# Altium PCB LoRaGN.PcbDoc
Units mm, origin at the board's own origin, x right, y up, seen from the top; angles counter-clockwise.
Board outline 50 x 35 mm, 2 copper layers (Top Layer, Bottom Layer), stack 1.071 mm thick; 34 components, 30 nets, 190 pads, 175 vias.
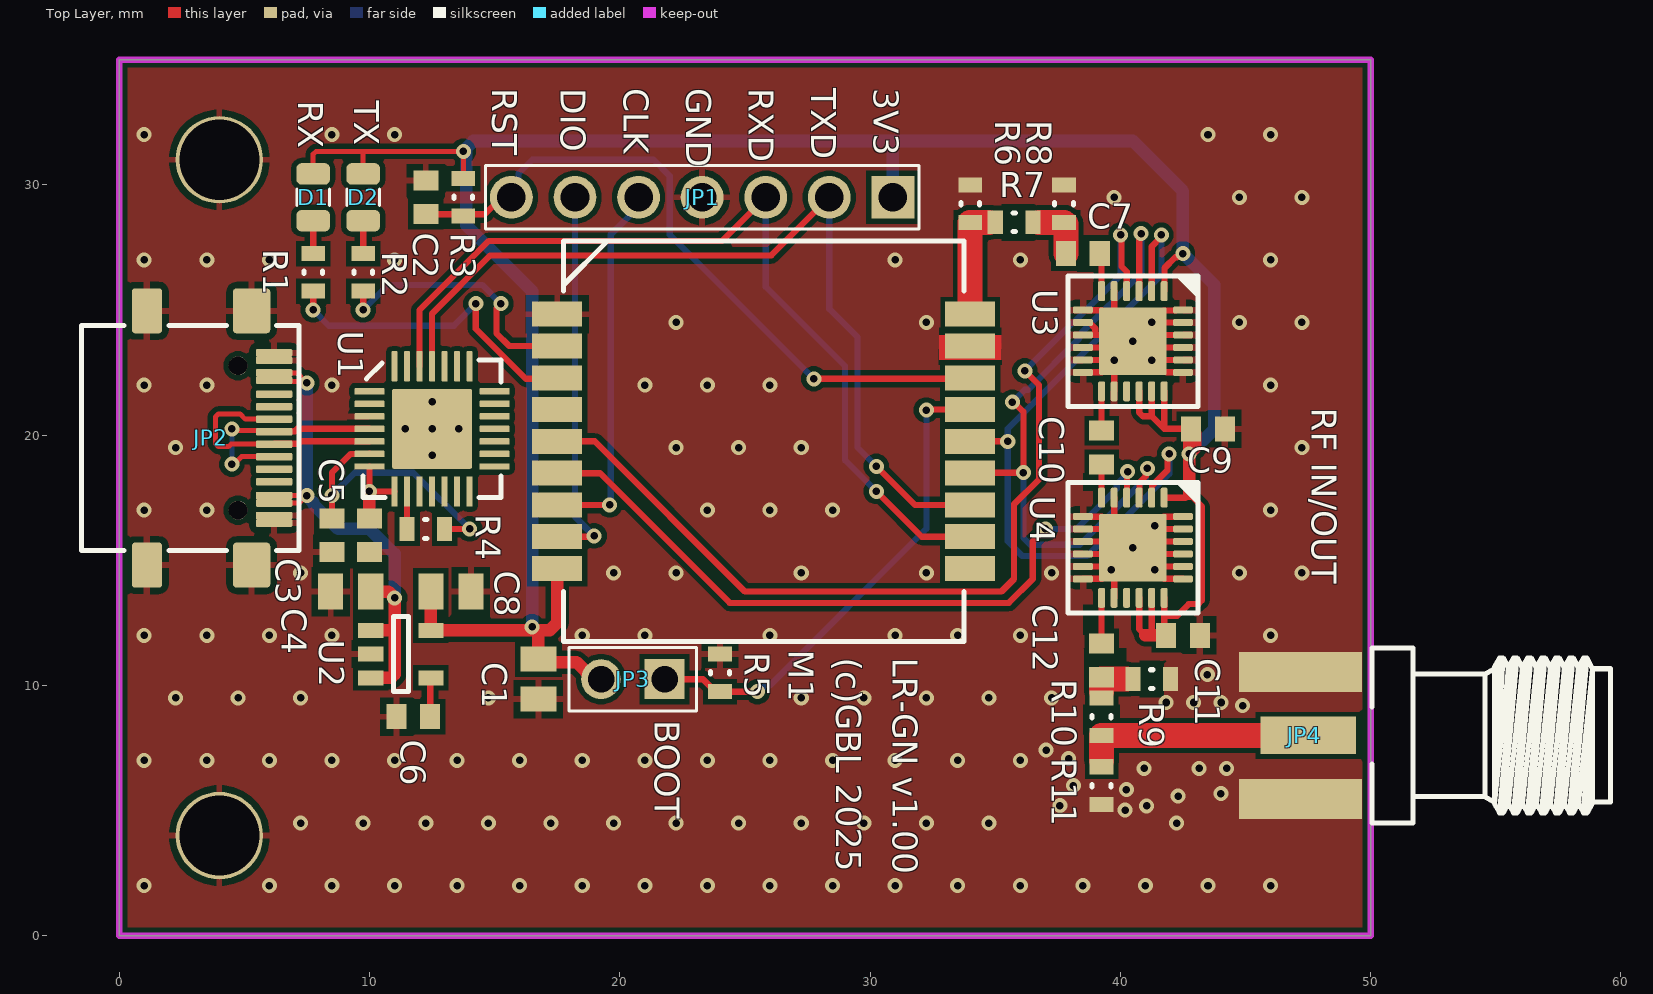
[diagram p0: Top Layer view]
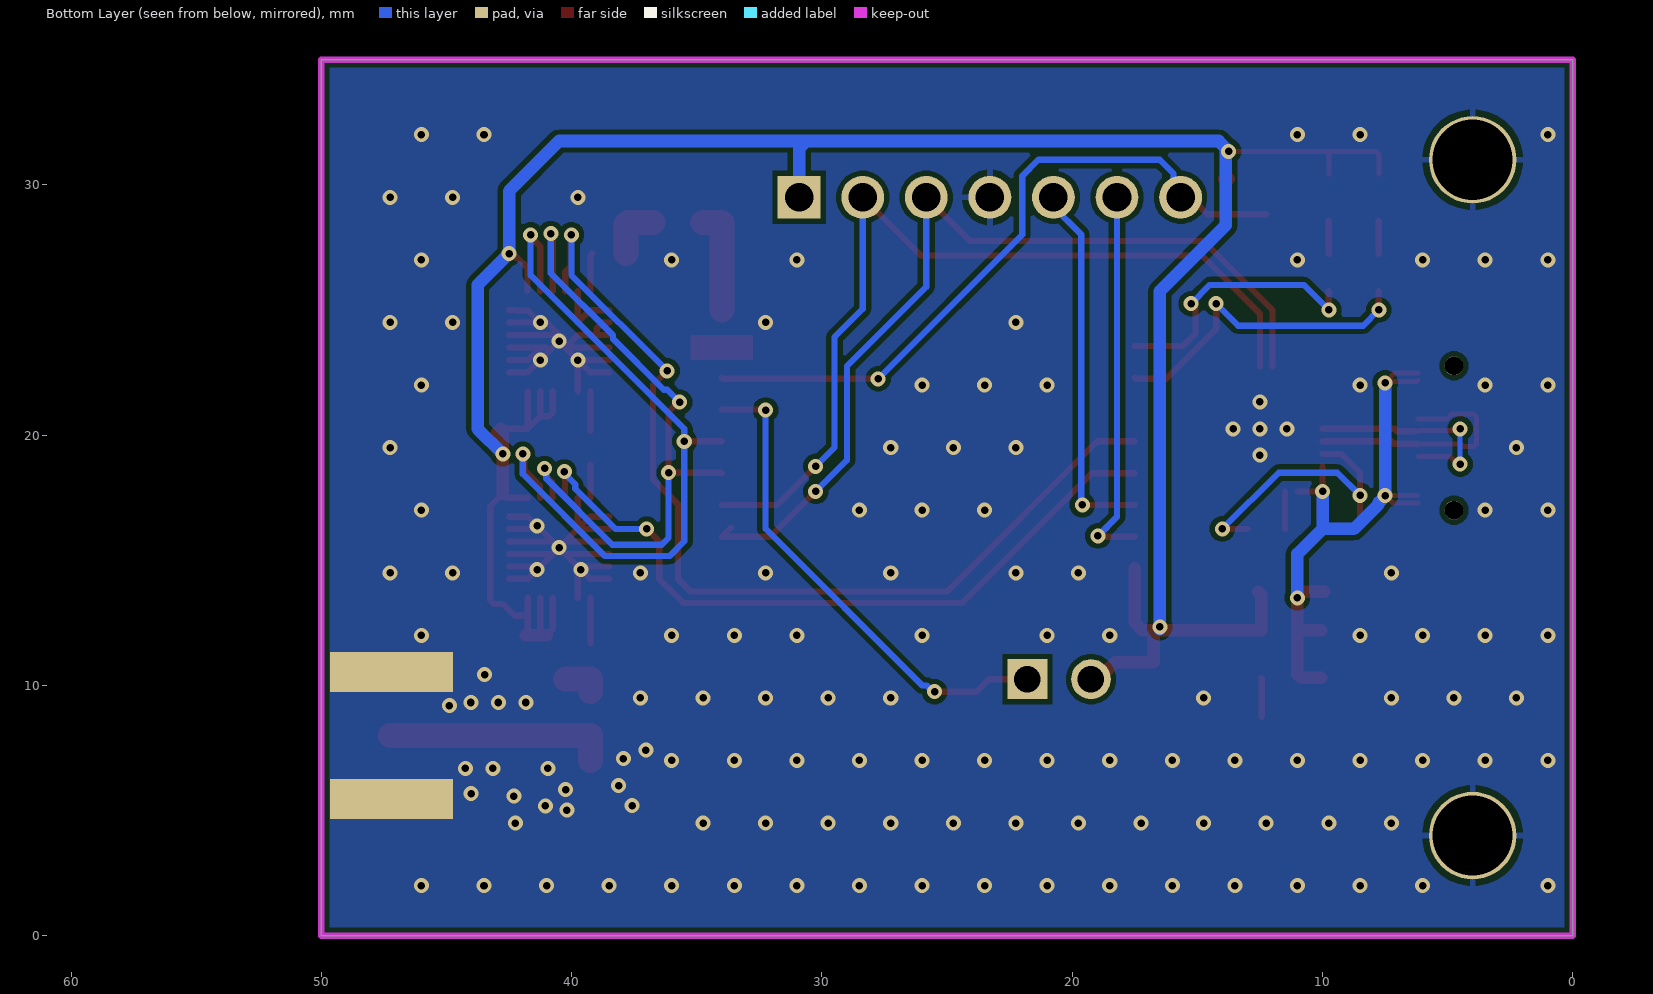
[diagram p1: Bottom Layer view, seen from below]
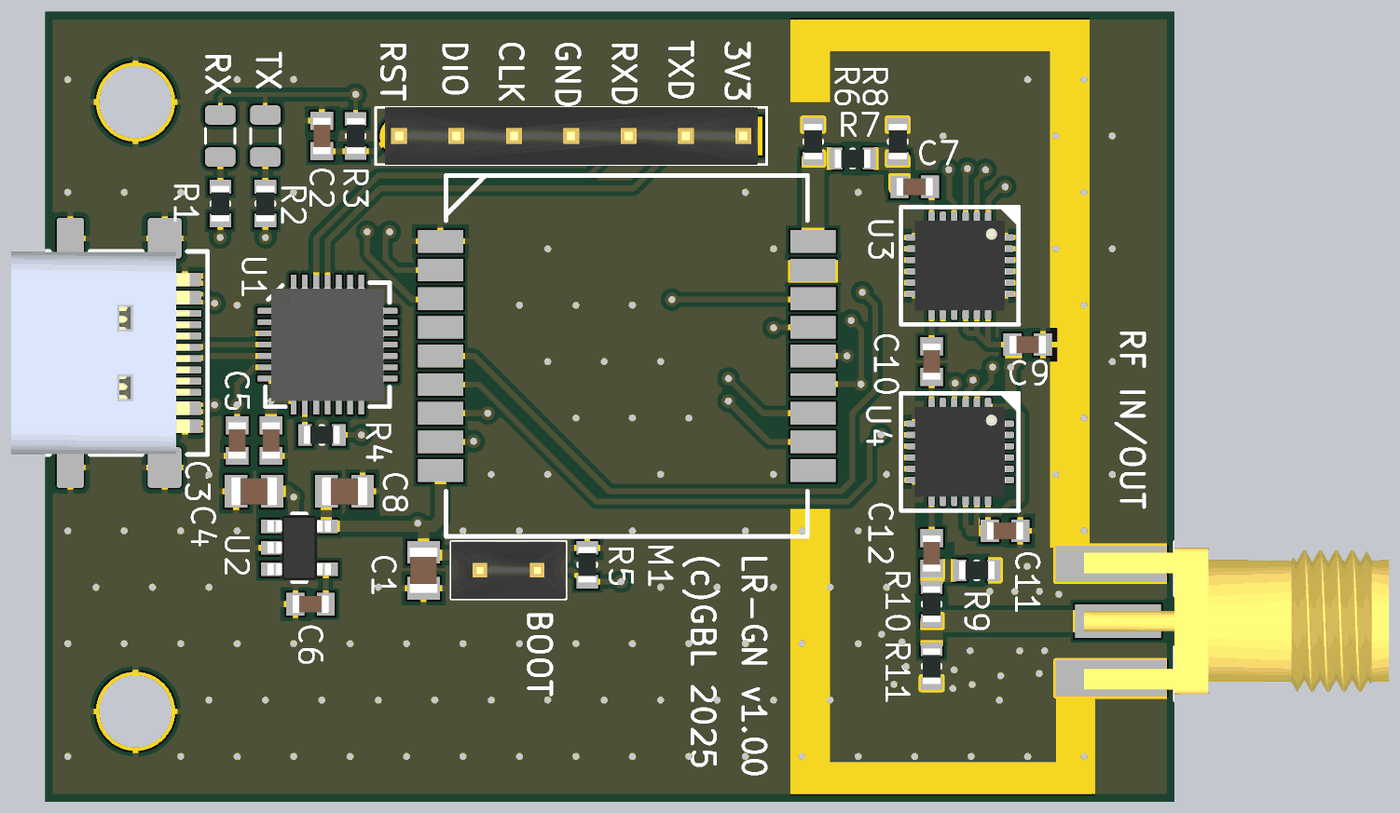
[diagram p2: 3D render of the assembled board from above, using the file's embedded part models]

## Layer stack, top to bottom
Top Solder: solder mask 0.0102, Solder Resist, Dk 3.5
Top Layer: signal copper 0.0356
Dielectric 1: dielectric 1, FR-4, Dk 4.6
Bottom Layer: signal copper 0.0356
Bottom Solder: solder mask 0.0102, Solder Resist, Dk 3.5

## Board outline
0,0 0,35 50,35 50,0

## Design rules (kind name [scope] priority, off if disabled: settings)
Clearance [All] p1: gap=0.2 ignorepadtopadclearanceinfootprint=FALSE
HoleSize [All] p1: absolutevalues=TRUE maxlimit=5 minlimit=0.025 maxpercent=80.000 minpercent=20.000
MinimumSolderMaskSliver [All] p1: minsoldermaskwidth=0.02
PolygonConnect PolygonConnect_2 [InComponent('JP4') Or InComponent('R6') Or InComponent('R8') Or InComponent('R9') Or InComponent('R11') vs IsNamedPolygon('GND_L01_P001') Or IsNamedPolygon('GND_L02_P000')] p1: thpad.connectstyle=Relief thpad.reliefconductorwidth=0.254 thpad.reliefentries=4 thpad.polygonreliefangle="90 Angle" thpad.airgapwidth=0.254 smdpad.connectstyle=Direct smdpad.reliefconductorwidth=0.254 smdpad.reliefentries=4 smdpad.polygonreliefangle="90 Angle" smdpad.airgapwidth=0.254 via.connectstyle=Relief via.reliefconductorwidth=0.254 via.reliefentries=4 via.polygonreliefangle="90 Angle" via.airgapwidth=0.254
PolygonConnect PolygonConnect_1 [All vs IsNamedPolygon('GND_L01_P001') Or IsNamedPolygon('GND_L02_P000')] p2: thpad.connectstyle=Relief thpad.reliefconductorwidth=0.254 thpad.reliefentries=4 thpad.polygonreliefangle="90 Angle" thpad.airgapwidth=0.254 smdpad.connectstyle=Relief smdpad.reliefconductorwidth=0.254 smdpad.reliefentries=4 smdpad.polygonreliefangle="90 Angle" smdpad.airgapwidth=0.254 via.connectstyle=Direct via.reliefconductorwidth=0.254 via.reliefentries=4 via.polygonreliefangle="90 Angle" via.airgapwidth=0.254
PolygonConnect [All] p3: connectstyle=Relief reliefconductorwidth=0.254 reliefentries=4 polygonreliefangle="90 Angle" airgapwidth=0.254
RoutingVias [All] p1: holewidth=0.711 width=1.27 viastyle="Through Hole" minholewidth=0.711 minwidth=1.27 maxholewidth=0.711 maxwidth=1.27
SilkToSilkClearance [All] p1: silktosilkclearance=0.1
SilkToSolderMaskClearance [IsPad] p1: minsilkscreentomaskgap=0.1 clearancetoexposedcopper=TRUE
SolderMaskExpansion [All] p1: expansion=0.102 istentingtop=FALSE
Width [All] p1: maxlimit=2 minlimit=0.2 preferedwidth=0.2
26 further rules are at their usual default settings.

## Components (designator, comment, footprint, x,y, rotation, side; value= is the part's Value field where it differs from the comment)
C1 "22uF" C-0805 16.75,10.25 r90 top
C2 "100nF" C-0603 12.25,29.5 r270 top
C3 "1000pF" C-0603 8.5,16 r270 top
C4 "22uF" C-0805 9.25,13.75 r180 top
C5 "1000pF" C-0603 10,16 r90 top
C6 "nc" C-0603 11.75,8.75 r180 top
C7 "100pF" C-0603 38.5,27.25 r0 top
C8 "22uF" C-0805 13.25,13.75 r0 top
C9 "10nF" C-0603 43.5,20.25 r180 top
C10 "100pF" C-0603 39.25,19.5 r270 top
C11 "10nF" C-0603 42.5,12 r180 top
C12 "100pF" C-0603 39.25,11 r270 top
D1 "DLED" LED0805 7.75,29.5 r270 top
D2 "DLED" LED0805 9.75,29.5 r270 top
JP1 "HEADER 7" PLS1-7 30.91,29.5 r180 top
JP2 "L-KLS1-5473" L-KLS1-5473 6.19,19.885 r270 top
JP3 "HEADER 2" PLS1-2 21.79,10.25 r180 top
JP4 "EM-SA071-GGT" SMA_F_EDGE 48.77,8 r180 top
M1 "RA-08" LGA18_RA08 25.75,19.75 r0 top
R1 "1k" R-0603 7.75,26.5 r90 top
R2 "1k" R-0603 9.75,26.5 r90 top
R3 "10k" R-0603 13.75,29.5 r90 top
R4 "10k" R-0603 12.25,16.25 r0 top
R5 "100k" R-0603 24,10.5 r270 top
R6 "RES" R-0603 34,29.25 r270 top
R7 "RES" R-0603 35.75,28.5 r0 top
R8 "RES" R-0603 37.75,29.25 r270 top
R9 "RES" R-0603 41.25,10.25 r180 top
R10 "RES" R-0603 39.25,8.75 r270 top
R11 "RES" R-0603 39.25,6 r90 top
U1 "CP2102" QFN28 12.5,20.25 r0 top value={Value}
U2 "LP5907MFX-3.0" SOT-23-5 11.25,11.25 r0 top
U3 "HMC1122LP4ME" QFN-24(4X4) 40.5,23.75 r270 top value=HMC8073LP3DE
U4 "HMC1122LP4ME" QFN-24(4X4) 40.5,15.5 r270 top value=HMC8073LP3DE

## Footprints (in the part's own frame and the unit in brackets; to place one, negate y for a bottom-side part, rotate by r counter-clockwise, add the part's x,y. Pads: shape width x height; smd on the part's side, far side on the other; paste and mask are expansions set on the pad)
C-0603 [mm] "Chip Capacitor, 2-Leads, Body 1,60x0,80mm, IPC Medium Density"
  rect 0.8x1 smd: 1(-0.675,0) 2(0.675,0)
  body extent -0.8,-0.4 0.8,0.4, height 0.8
C-0805 [mm] "Chip Capacitor, 2-Leads, Body 2,00x1,25mm, IPC Medium Density"
  rect 1x1.45 smd: 1(-0.8,0) 2(0.8,0)
  body extent -1,-0.62 1,0.63, height 1.25
L-KLS1-5473 [mm] "USB 3.1 Type C"
  rrect20% 1.8x1.5 smd mask+0.07: 1(-5.08,-0.9) 1(5.08,-0.9)
  rrect20% 1.8x1.2 smd mask+0.07: 1(-5.08,-5.08) 1(5.08,-5.08)
  rrect30% 0.3x1.45 smd paste-2 mask+0.07: A1(-3.1,0) A4(-2.6,0) A9(2.6,0) A12(3.4,0) B1(3.1,0) B4(2.3,0) B9(-2.3,0) B12(-3.4,0)
  rrect30% 0.3x1.45 smd mask+0.07: A5(-1.25,0) A6(-0.25,0) A7(0.25,0) A8(1.25,0) B5(1.75,0) B6(0.75,0) B7(-0.75,0) B8(-1.75,0)
  round 0.75 hole 0.75 unplated paste-2 mask+0.07: MH(-2.885,-1.44) MH(2.885,-1.44)
  silkscreen extent -4.5,-7.69 4.5,1, body extent -4.47,-7.7 4.47,0.2, height 3.2
LED0805 [mm] "LED, Chip; 2.00 mm L X 1.25 mm W X 0.80 mm H body"
  rrect51% 0.86x1.35 smd: 1(-0.935,0) 2(0.935,0)
  silkscreen extent -0.33,-0.65 0.33,0.65, body extent -1,-0.63 1,0.63, height 0.25
LGA18_RA08 [mm]
  rect 2x1 smd: 1(-8.25,5.08) 2(-8.25,3.81) 3(-8.25,2.54) 4(-8.25,1.27) 5(-8.25,0) 6(-8.25,-1.27) 7(-8.25,-2.54) 8(-8.25,-3.81) 9(-8.25,-5.08) 10(8.25,-5.08) 11(8.25,-3.81) 12(8.25,-2.54) 13(8.25,-1.27) 14(8.25,0) 15(8.25,1.27) 16(8.25,2.54) 17(8.25,3.81) 18(8.25,5.08)
  silkscreen extent -8,-8 8,8, body extent -7.5,-7.5 7.5,7.53, height 1.5
PLS1-2 [mm] "Header, Vertical, 2.54 mm pitch; 0.64 mm lead width, 2 pins, 1 row, 2 pins per row, 5.08 mm L X 2.54 mm W X 8.54 mm H body"
  rect 1.59x1.59 hole 1.06 paste-1.59: 1(0,0)
  round 1.59 hole 1.06 paste-1.59: 2(2.54,0)
  silkscreen extent -1.27,-1.27 3.81,1.27, body extent -1.27,-1.27 3.81,1.27, height 8.54
PLS1-7 [mm] "Header, Vertical, 2.54 mm pitch; 0.70 mm lead width, 7 pins, 1 row, 7 pins per row, 16.51 mm L X 2.54 mm W X 7.54 mm H body"
  rect 1.71x1.71 hole 1.14 paste-1.71: 1(0,0)
  round 1.71 hole 1.14 paste-1.71: 2(2.54,0) 3(5.08,0) 4(7.62,0) 5(10.16,0) 6(12.7,0) 7(15.24,0)
  silkscreen extent -1.04,-1.27 16.28,1.27, body extent -0.64,-1.27 15.88,1.27, height 7.54
QFN28 [mm]
  rrect20% 1.2x0.25 smd: 1(-2.5,1.5) 2(-2.5,1) 3(-2.5,0.5) 4(-2.5,0) 5(-2.5,-0.5) 6(-2.5,-1) 7(-2.5,-1.5) 15(2.5,-1.5) 16(2.5,-1) 17(2.5,-0.5) 18(2.5,0) 19(2.5,0.5) 20(2.5,1) 21(2.5,1.5)
  rrect20% 0.25x1.2 smd: 8(-1.5,-2.5) 9(-1,-2.5) 10(-0.5,-2.5) 11(0,-2.5) 12(0.5,-2.5) 13(1,-2.5) 14(1.5,-2.5) 22(1.5,2.5) 23(1,2.5) 24(0.5,2.5) 25(0,2.5) 26(-0.5,2.5) 27(-1,2.5) 28(-1.5,2.5)
  rrect5% 3.2x3.2 smd paste-4: 29(0,0)
  silkscreen extent -2.75,-2.75 2.75,2.75, body extent -2.5,-2.5 2.5,2.5, height 1
QFN-24(4X4) [mm]
  rrect50% 0.8x0.28 smd mask+0.06: 1(-2,1.25) 2(-2,0.75) 3(-2,0.25) 4(-2,-0.25) 5(-2,-0.75) 6(-2,-1.25) 13(2,-1.25) 14(2,-0.75) 15(2,-0.25) 16(2,0.25) 17(2,0.75) 18(2,1.25)
  rrect50% 0.28x0.8 smd mask+0.06: 7(-1.25,-2) 8(-0.75,-2) 9(-0.25,-2) 10(0.25,-2) 11(0.75,-2) 12(1.25,-2) 19(1.25,2) 20(0.75,2) 21(0.25,2) 22(-0.25,2) 23(-0.75,2) 24(-1.25,2)
  rrect5% 2.7x2.7 smd paste-2 mask+0.06: 25(0,0)
  silkscreen extent -2.6,-2.6 2.6,2.6, body extent -2,-2 2,2, height 0.77
R-0603 [mm] "Chip Resistor, 2-Leads, Body 1,60x0,82mm, IPC Medium Density"
  rect 0.6x0.95 smd: 1(-0.75,0) 2(0.75,0)
  silkscreen extent -0.05,-0.38 0.05,0.38, body extent -0.8,-0.4 0.8,0.4, height 0.45
SMA_F_EDGE [mm] "SMA End Launch Jack for 1.58mm PCB, 50 Ohm, Flat Tab Contact"
  rect 3.81x1.5 smd: 1(1.27,0)
  rect 4.9x1.6 smd: 2(1.575,2.54) 2(1.575,-2.54)
  rect 4.9x1.6 smd far side: 2(1.575,2.54) 2(1.575,-2.54)
  silkscreen extent -10.81,-3.5 -1.28,3.5, body extent -10.73,-3.25 2.77,3.25, height 3.7
SOT-23-5 [mm] "SOT23, 5-Leads, Body 2,90x2,45mm, Pitch 0,95mm, IPC Medium Density"
  rect 1x0.6 smd: 1(-1.2,0.95) 2(-1.2,0) 3(-1.2,-0.95) 4(1.2,-0.95) 5(1.2,0.95)
  silkscreen extent -0.3,-1.5 0.3,1.5, body extent -1.4,-1.45 1.4,1.45, height 1.55

## Part data
C1 C2 C3 C4 C5 C6 C7 C8 C9 C10 C11 C12: library part CAPN, Voltage=50V, Вид=Конденсатор, Точність/група=NP0
JP4: library part SMA, "SMA Female R/A PCB Mount", Вид=Роз'єм
R1 R2 R3 R4 R5: library part RES, Вид=Резистор, Точність/група=5%
U2: library part LP5907, "250mA Low-Dropout Regulator", Вид=Мікросхема
U3 U4: library part HMC1122, Вид=Мікросхема
D1 D2: Вид=Світлодіод
JP1 JP3: Вид=Роз'єм
JP2 U1: Mounting  Method=SMD
R6 R7 R8 R9 R10 R11: Вид=Резистор, Точність/група=5%

## Free pads (board coordinates)
  round 3.5 hole 3.2: 1(4,4) 1(4,31)

## Via types
v1: diameter 0.6, hole 0.3, Top Layer to Bottom Layer, tented both sides, 162 vias
v2: diameter 0.6, hole 0.3, Top Layer to Bottom Layer, 13 vias

## Nets (pads, with @x,y where several pads share a name; then routed paths per layer and width w, separated by ;. In a path a pad name is that pad's centre, name@x,y a point inside that pad or via, vN(x,y) a via of type N, cw(c..) or ccw(c..) an arc to the next point about the centre after c; other vN are vias at no path point)
CLK: M1.14 U3.2 U4.2 | length 29.6
  Top Layer w0.25: M1.14 v1(35.5,19.75) ; U4.2 41.265,17.515 41.265,17.974 41.516,18.225 ; U3.2 41.25,27.534 41.638,27.922 v1(41.638,27.999) ; 41.516,18.225 41.883,18.592 41.883,19.183 v1(41.95,19.25)
  Bottom Layer w0.25: v1(41.638,27.999) 41.638,26.388 35.5,20.25 35.5,18.917 35.496,18.913 35.496,15.754 36.081,15.169 38.669,15.169 41.95,18.45 v1(41.95,19.25)
DATA: M1.13 U3.3 U4.3 | length 26.9
  Top Layer w0.25: M1.13 34.02,18.5 v1(36.123,18.5) 36.127,18.5 36.127,20.928 35.738,21.317 v1(35.683,21.317) ; U4.3 40.765,17.515 40.765,18.11 41.015,18.36 41.015,18.607 v1(41.082,18.674) ; U3.3 v1@40.75,28.052
  Bottom Layer w0.25: v1(35.683,21.317) 36.182,21.816 36.316,21.816 38.348,23.848 38.348,23.982 40.832,26.466 v1(40.832,28.052) ; v1(36.123,18.5) 36.127,18.496 36.127,15.899 36.403,15.623 38.373,15.623 41.015,18.265 41.015,18.607 v1(41.082,18.674)
DN: JP2.A7 JP2.B7 U1.5 | length 9.8
  Top Layer w0.2: JP2.A7 4.476,19.635 4.376,19.535 3.967,19.535 3.85,19.652 3.85,20.733 3.967,20.85 4.826,20.85 5.041,20.635 JP2.B7
  Top Layer w0.25: JP2.A7 6.213,19.658 6.882,19.658 7.166,19.658 7.258,19.75 U1.5
DP: JP2.A6 JP2.B6 U1.4 | length 8.7
  Top Layer w0.2: v1@4.5,18.75 4.885,19.135 JP2.B6 ; v1(4.5,20.25) 4.565,20.185 6.14,20.185 JP2.A6
  Top Layer w0.25: JP2.A6@6.326,20.158 7.024,20.158 7.116,20.25 U1.4
  Bottom Layer w0.2: v1(4.5,18.838) v1(4.5,20.25)
GND: C1.1 C2.1 C3.2 C4.2 C5.1 C6.2 C8.2 C9.1 C11.1 JP1.4 JP2.1 JP2.A1 JP2.A12 JP2.B1 JP2.B12 JP4.2 M1.1 M1.17 pad.1 R5.1 R6.1 R8.1 R9.1 R11.1 U1.3 U1.29 U2.2 U3.5 U3.7 U3.8 U3.9 U3.10 U3.11 U3.12 U3.14 U3.19 U3.20 U3.21 U3.22 U3.23 U3.24 U3.25 U4.5 U4.7 U4.8 U4.9 U4.10 U4.11 U4.12 U4.14 U4.19 U4.20 U4.21 U4.22 U4.23 U4.24 U4.25 | length 48.1
  Top Layer w0.25: U4.12 38.513,14.263 39.263,14.263 U4.25@39.75,14.75 ; U4.11 U4.25@39.75,14.75 ; U4.10 U4.25@40.25,15.25 ; U4.9 U4.25@40.25,15.75 ; U4.8 U4.25@39.75,16.25 ; U4.7 38.513,16.737 39.263,16.737 U4.25@39.75,16.25 ; U3.12 38.513,22.513 39.263,22.513 v2(39.75,23) ; U3.11 v2(39.75,23) ; U3.10 U3.25@40.25,23.5 ; U3.9 39,24 ; U3.8 38.76,24.5 39,24.26 39,24 ; U3.7 38.515,24.985 39.265,24.985 39.75,24.5 U3.5 ; U4.14 U4.25@39.75,14.75 ; U4.5 U4.25@39.75,16.25 ; U3.14 v2(39.75,23) ; U3.25@40.325,23.925 v2(40.5,23.75) ; U4.25@40.75,15.75 U4.22 ; U3.25@41,23.5 U3.25@41.35,23.5 ; v2(41.25,23) v2(40.5,23.75) ; U3.25@41.306,22.944 41.725,22.525 41.838,22.525 41.848,22.515 42.485,22.515 U3.19 ; U4.19 42.487,14.263 41.737,14.263 U4.25@41.25,14.75 ; U4.20 U4.25@41.25,14.75 ; U4.21 U4.25@40.75,15.25 ; U4.23 U4.25@41.25,16.25 ; U4.24 42.487,16.737 41.737,16.737 U4.25@41.25,16.25 ; U3.20 41.725,23 41.35,23.375 U3.25@41.35,23.5 ; U3.21 U3.25@41.35,23.5 ; U3.22 40.75,24 v2(40.5,23.75) ; U3.23 v2(41.25,24.5) ; U3.24 42.24,25 42.215,24.975 41.725,24.975 v2(41.25,24.5) ; 39,24 39.75,24 39.9,23.85 U3.25@40.25,23.5 ; U4.25@39.75,14.75 U4.25@40.25,15.25 ; U4.25@39.75,16.25 U4.25@40.25,15.75 ; v2(39.75,23) U3.25@40.25,23.5 ; U4.25@40.25,15.25 v2(40.5,15.5) ; U4.25@40.25,15.75 v2(40.5,15.5) ; v2(40.5,15.5) U4.25@41.25,16.25 ; v2(40.5,15.5) U4.25@40.75,15.25 ; v2(40.5,23.75) 40.5,24 41,24.5 v2(41.25,24.5) ; U4.25@40.75,15.25 U4.25@41.25,14.75
  other v1: 1,2 6,2 8.5,2 11,2 13.5,2 16,2 18.5,2 21,2 23.5,2 26,2 28.5,2 31,2 33.5,2 36,2 38.5,2 41,2 43.5,2 46,2 7.25,4.5 9.75,4.5 12.25,4.5 14.75,4.5 17.25,4.5 19.75,4.5 22.25,4.5 24.75,4.5 27.25,4.5 29.75,4.5 32.25,4.5 34.75,4.5 42.25,4.5 40.189,5.014 37.579,5.197 41.046,5.186 42.308,5.574 44.016,5.673 40.243,5.839 38.118,5.992 40.949,6.683 43.149,6.683 44.249,6.683 1,7 3.5,7 6,7 8.5,7 11,7 13.5,7 16,7 18.5,7 21,7 23.5,7 26,7 28.5,7 31,7 33.5,7 36,7 37.933,7.077 37.032,7.411 44.882,9.188 41.826,9.317 42.926,9.317 44.026,9.317 2.25,9.5 4.75,9.5 7.25,9.5 14.75,9.5 27.25,9.5 29.75,9.5 32.25,9.5 34.75,9.5 37.25,9.5 43.476,10.426 1,12 3.5,12 6,12 8.5,12 18.5,12 21,12 26,12 31,12 33.5,12 36,12 46,12 7.25,14.5 19.75,14.5 22.25,14.5 27.25,14.5 32.25,14.5 37.25,14.5 44.75,14.5 47.25,14.5 1,17 3.5,17 23.5,17 26,17 28.5,17 46,17 2.25,19.5 22.25,19.5 24.75,19.5 27.25,19.5 47.25,19.5 1,22 3.5,22 8.5,22 21,22 23.5,22 26,22 46,22 22.25,24.5 32.25,24.5 44.75,24.5 47.25,24.5 1,27 3.5,27 6,27 11,27 31,27 36,27 46,27 39.75,29.5 44.75,29.5 47.25,29.5 1,32 8.5,32 11,32 43.5,32 46,32
  other v2: 39.625,14.625 41.375,14.625 41.375,16.375 12.5,19.2 11.425,20.25 12.5,20.25 13.575,20.25 12.5,21.325
LE1: M1.5 U3.4 | length 39.3
  Top Layer w0.25: M1.5 19,19.75 25,13.75 35.25,13.75 35.75,14.25 35.75,17.236 36.75,18.236 36.75,22 v1(36.182,22.568) ; v1(40.006,28.004) 40.042,27.967 40.042,26.739 40.25,26.531 U3.4
  Bottom Layer w0.25: v1(36.182,22.568) 40.006,26.393 v1(40.006,28.004)
LE2: M1.6 U4.4 | length 29.2
  Top Layer w0.25: M1.6 19.214,18.48 24.398,13.296 35.546,13.296 36.5,14.25 36.5,15.75 v1(37,16.25) ; U4.4 40.265,17.515 40.265,18.515 v1(40.292,18.542)
  Bottom Layer w0.25: v1(37,16.25) 38.25,16.25 39.852,17.852 39.852,18.029 40.292,18.469 v1(40.292,18.542)
NetC3_1: C3.1 R4.2 U1.6 | length 11.4
  Top Layer w0.25: C3.1 v1(8.5,17.588) 8.5,18.5 9.248,19.248 9.998,19.248 U1.6 ; R4.2 v1(14,16.25)
  Bottom Layer w0.25: v1(8.5,17.588) 9.412,18.5 11.75,18.5 v1(14,16.25)
NetC6_1: C6.1 U2.4 | length 1.6
  Top Layer w0.25: C6.1 12.425,10.275 U2.4
NetC7_1: C7.1 R7.2 R8.2 | length 2.5
  Top Layer w0.25: R7.2 R7.2@36.75,28.5 ; R8.2 R8.2@37.825,28.425
  Top Layer w1: R7.2@36.75,28.5 R8.2 ; C7.1 R8.2@37.825,28.425
NetC7_2: C7.2 U3.6 | length 1.5
  Top Layer w0.25: C7.2 39.25,27.175 U3.6
NetC10_1: C10.1 U3.13 | length 1.6
  Top Layer w0.25: C10.1 U3.13
NetC10_2: C10.2 U4.6 | length 1.3
  Top Layer w0.25: U4.6 C10.2
NetC12_1: C12.1 U4.13 | length 1.8
  Top Layer w0.25: C12.1 U4.13
NetC12_2: C12.2 R9.2 R10.1 | length 1.4
  Top Layer w1: R10.1@39.25,9.75 C12.2@39.25,10.25 ; C12.2@39.325,10.25 R9.2@40.25,10.25
NetD1_2: D1.2 R1.2 | length 1.3
  Top Layer w0.25: R1.2 D1.2
NetD2_2: D2.2 R2.2 | length 1.3
  Top Layer w0.25: R2.2 D2.2
NetJP3_1: JP3.1 M1.15 R5.2 | length 19.9
  Top Layer w0.25: JP3.1 23.325,10.25 23.825,9.75 R5.2 v1(25.5,9.75) ; v1(32.25,21) 32.27,21.02 M1.15
  Bottom Layer w0.25: v1(25.5,9.75) 25.572,9.75 25.822,10 26,10 32.25,16.25 v1(32.25,21)
NetJP4_1: JP4.1 R10.2 R11.2 | length 9.3
  Top Layer w0.25: JP4.1@47.23,8 JP4.1@47.48,8.25
  Top Layer w1: R11.2@39.25,7 R10.2 JP4.1@47.23,8
NetM1_2: M1.2 R2.1 | length 10.9
  Top Layer w0.25: v1(9.75,25) R2.1 ; v1(15.25,25.25) 15.071,25.071 15.071,24.071 15.582,23.56 M1.2
  Bottom Layer w0.25: v1(9.75,25) 10.75,26 14.5,26 v1(15.25,25.25)
NetM1_3: M1.3 R1.1 | length 13
  Top Layer w0.25: v1(7.75,25) R1.1 ; v1(14.25,25.25) 14.25,24.25 16.25,22.25 17.46,22.25 M1.3
  Bottom Layer w0.25: v1(7.75,25) 8.377,24.373 13.373,24.373 v1(14.25,25.25)
NetM1_18: M1.18 R6.2 R7.1 | length 4.5
  Top Layer w0.25: R7.1@34.75,28.5 R7.1
  Top Layer w1: M1.18@34,25 R6.2 R7.1@34.75,28.5
NetR4_1: R4.1 U1.9 | length 1.5
  Top Layer w0.25: R4.1 U1.9
R\S\T\: C2.2 JP1.7 M1.16 R3.1 | length 28.1
  Top Layer w0.25: C2.2 13.75,28.825 14.601,28.825 15.276,29.5 JP1.7 ; v1(27.75,22.25) 33.96,22.25 M1.16
  Bottom Layer w0.25: JP1.7 15.949,29.779 15.949,30.449 16.5,31 21.351,31 22,30.351 22,28 v1(27.75,22.25)
RXD: JP1.3 M1.11 U1.26 | length 36.6
  Top Layer w0.25: U1.26 12,25 14.75,27.75 24.08,27.75 JP1.3 ; v1(30.25,17.75) 32.06,15.94 M1.11 M1.11@33.627,16.313
  Bottom Layer w0.25: JP1.3 25.83,25.92 29,22.75 29,19 v1(30.25,17.75)
SWCLK: JP1.5 M1.7 | length 14.9
  Top Layer w0.25: M1.7 v1(19.597,17.21)
  Bottom Layer w0.25: v1(19.597,17.21) 19.641,17.254 19.641,28.014 20.75,29.123 JP1.5
SWDIO: JP1.6 M1.8 | length 15.4
  Top Layer w0.25: M1.8 18.94,15.94 v1(18.97,15.97) v1@19,16
  Bottom Layer w0.25: JP1.6@18.21,29.482 18.21,16.73 v1(18.97,15.97)
TXD: JP1.2 M1.12 U1.25 | length 35.8
  Top Layer w0.25: U1.25 12.5,24.858 14.821,27.179 26.049,27.179 JP1.2 ; v1(30.25,18.75) 31.79,17.21 M1.12
  Bottom Layer w0.25: JP1.2 28.37,25.04 29.5,23.91 29.5,19.5 v1(30.25,18.75)
VBUS: C4.1 C5.2 JP2.A4 JP2.A9 JP2.B4 JP2.B9 U1.7 U1.8 U2.1 U2.3 | length 27
  Top Layer w0.2: JP2.A9 7.197,17.285 7.497,17.586 JP2.B4 ; JP2.B9 6.239,22.136 v1@7.451,22.136 ; JP2.A4 7.103,22.485 v1@7.451,22.136 ; v1(7.5,22.087) v1@7.451,22.136
  Top Layer w0.25: v1(10,17.75) U1.7 ; v1@10.037,17.75 U1.8
  Top Layer w0.5: C4.1@9.925,13.75 C4.1 10.75,13.75 v1(11,13.5) 11,12.25 ; C5.2 v1(10,17.75) ; U2.3 10.851,10.3 11,10.449 11,12.25 ; U2.1 10.95,12.2 11,12.25
  Bottom Layer w0.5: v1(7.5,22.087) 7.5,17.588 v1(7.499,17.586) 7.499,17.559 7.75,17.308 7.75,17.25 8.75,16.25 10,16.25 ; v1(10,17.75) 10,16.25 ; v1(11,13.5) 11,15.25 10,16.25
VCC: C1.2 C8.1 C9.2 C11.2 D1.1 D2.1 JP1.1 JP3.2 M1.9 R3.2 U2.5 U3.1 U3.16 U3.17 U3.18 U4.1 U4.16 U4.17 U4.18 | length 109.8
  Top Layer w0.2: D1.1 7.75,31.22 7.867,31.338 9.75,31.338 ; D2.1 9.75,31.338 ; R3.2 v1(13.75,31.338) 9.75,31.338
  Top Layer w0.25: U4.16 40.75,12.25 41,12 ; U3.16 40.75,20.899 40.899,20.75 41.25,20.75 ; 41.25,12 U4.17 ; U3.17 41.25,20.75 ; C11.2@41.75,12.075 41.75,12.788 ; U4.18 41.75,12.788 ; U4.1 42.601,17.5 42.75,17.649 43.25,17.149 43.25,13.396 43.104,13.25 42.731,13.25 42.269,12.788 41.75,12.788 ; U3.18 41.75,20.25 ; U3.1@41.763,25.763 41.763,26.675 42.192,27.104 42.259,27.104 42.405,27.25 v1(42.5,27.25) ; C9.2 41.75,20.25 ; 41.25,20.75 41.75,20.25
  Top Layer w0.5: C8.1@12.575,13.75 12.45,13.625 U2.5 v1@16.75,12.2 ; R3.2 R3.2@13.925,30.25 ; M1.9 17.5,12.5 17.2,12.2 v1@16.75,12.2 ; JP3.2 18.937,10.25 18.262,10.925 16.75,10.925 C1.2 v1@16.75,12.2 ; 41,12 41.25,12 C11.2 C11.2@41.75,12.075 ; 42.75,17.649 v1(42.75,19.25) v1@42.752,19.252 ; v1@42.752,19.252 43,19.5 43,20.075 C9.2 42.752,20.177 v1@42.752,19.252
  Bottom Layer w0.5: v1@16.5,12.25 16.5,25.75 13.858,28.392 13.858,31.457 14.151,31.75 30.617,31.75 ; JP1.1 30.91,31.457 30.617,31.75 ; v1(42.75,19.25) 43.75,20.25 43.75,26 v1(42.5,27.25) 42.5,29.75 40.5,31.75 30.617,31.75
  other v1: 16.5,12.338
pads on no net: JP2.A5 JP2.A8 JP2.B5 JP2.B8 JP2.MH M1.4 M1.10 U1.1 U1.2 U1.10 U1.11 U1.12 U1.13 U1.14 U1.15 U1.16 U1.17 U1.18 U1.19 U1.20 U1.21 U1.22 U1.23 U1.24 U1.27 U1.28 U3.15 U4.15

## Polygon pours and split planes (outlines as drawn)
GND on Bottom Layer "GND_L02_P000" (solid, remove dead copper, pour order 0): 0,0 50,0 50,35 0,35
GND on Top Layer "GND_L01_P001" (solid, remove dead copper, pour order 1): 0,0 50,0 50,35 0,35

## Keep-outs
Keep-Out Layer:
  the board outline again, w0.254

## Other copper
Top Layer:
  rectangle net GND: 32.75,23 35.25,24
  pour cut-out: 35.25,29.25 35.25,27.75 36.567,27.75 36.567,29.25
  pour cut-out: 38.25,28 39.75,28 39.75,26.5 38.25,26.5
  pour cut-out: 38.5,18.5 38.5,17.75 39.25,17.75 39.25,18.5
  pour cut-out: 38.5,13.25 39.75,13.25 39.75,12 38.5,12
  pour cut-out: 38.5,9.25 38.5,8.044 38.544,8 40,8 40,9.25
  pour cut-out: 38.5,11.5 38.544,11.456 38.544,9.75 40.25,9.75 40.25,11.5
  pour cut-out: 40.75,11 40.75,9.5 41.75,9.5 41.75,11 41.771,10.979 41.873,10.979

## Silkscreen, mask and mechanical layers (free items; w line width, h text height)
Top Overlay:
  text "RST" at 14.9,33.85 h1 r270
  text "DIO" at 17.65,33.85 h1 r270
  text "CLK" at 20.15,33.85 h1 r270
  text "GND" at 22.65,33.85 h1 r270
  text "RXD" at 25.15,33.85 h1 r270
  text "TXD" at 27.65,33.85 h1 r270
  text "3V3" at 30.15,33.85 h1 r270
  text "RX" at 7.15,33.35 h1 r270
  text "TX" at 9.4,33.35 h1 r270
  text "RF IN/OUT" at 47.65,21.1 h1 r270
  text "(c)GBL 2025" at 28.65,11.1 h1 r270
  text "LR-GN v1.00" at 30.9,11.1 h1 r270
  text "BOOT" at 21.4,8.6 h1 r270
Top Solder:
  rectangle: 34.5,0.25 46.5,1.75
  rectangle: 33,0.25 34.75,13
  rectangle: 44.75,0.25 46.5,4.75
  rectangle: 44.5,11.25 46.25,33.75
  rectangle: 34.5,33.25 46.25,34.75
  rectangle: 33,31 34.75,34.75